# Altium PCB A1_v31.PcbDoc (part 2 of 2)
Units mm, origin at the board's own origin, x right, y up, seen from the top; angles counter-clockwise.
Board outline 100 x 80 mm, 2 copper layers (Top Layer, Bottom Layer); 46 components, 70 nets, 239 pads, 35 vias.
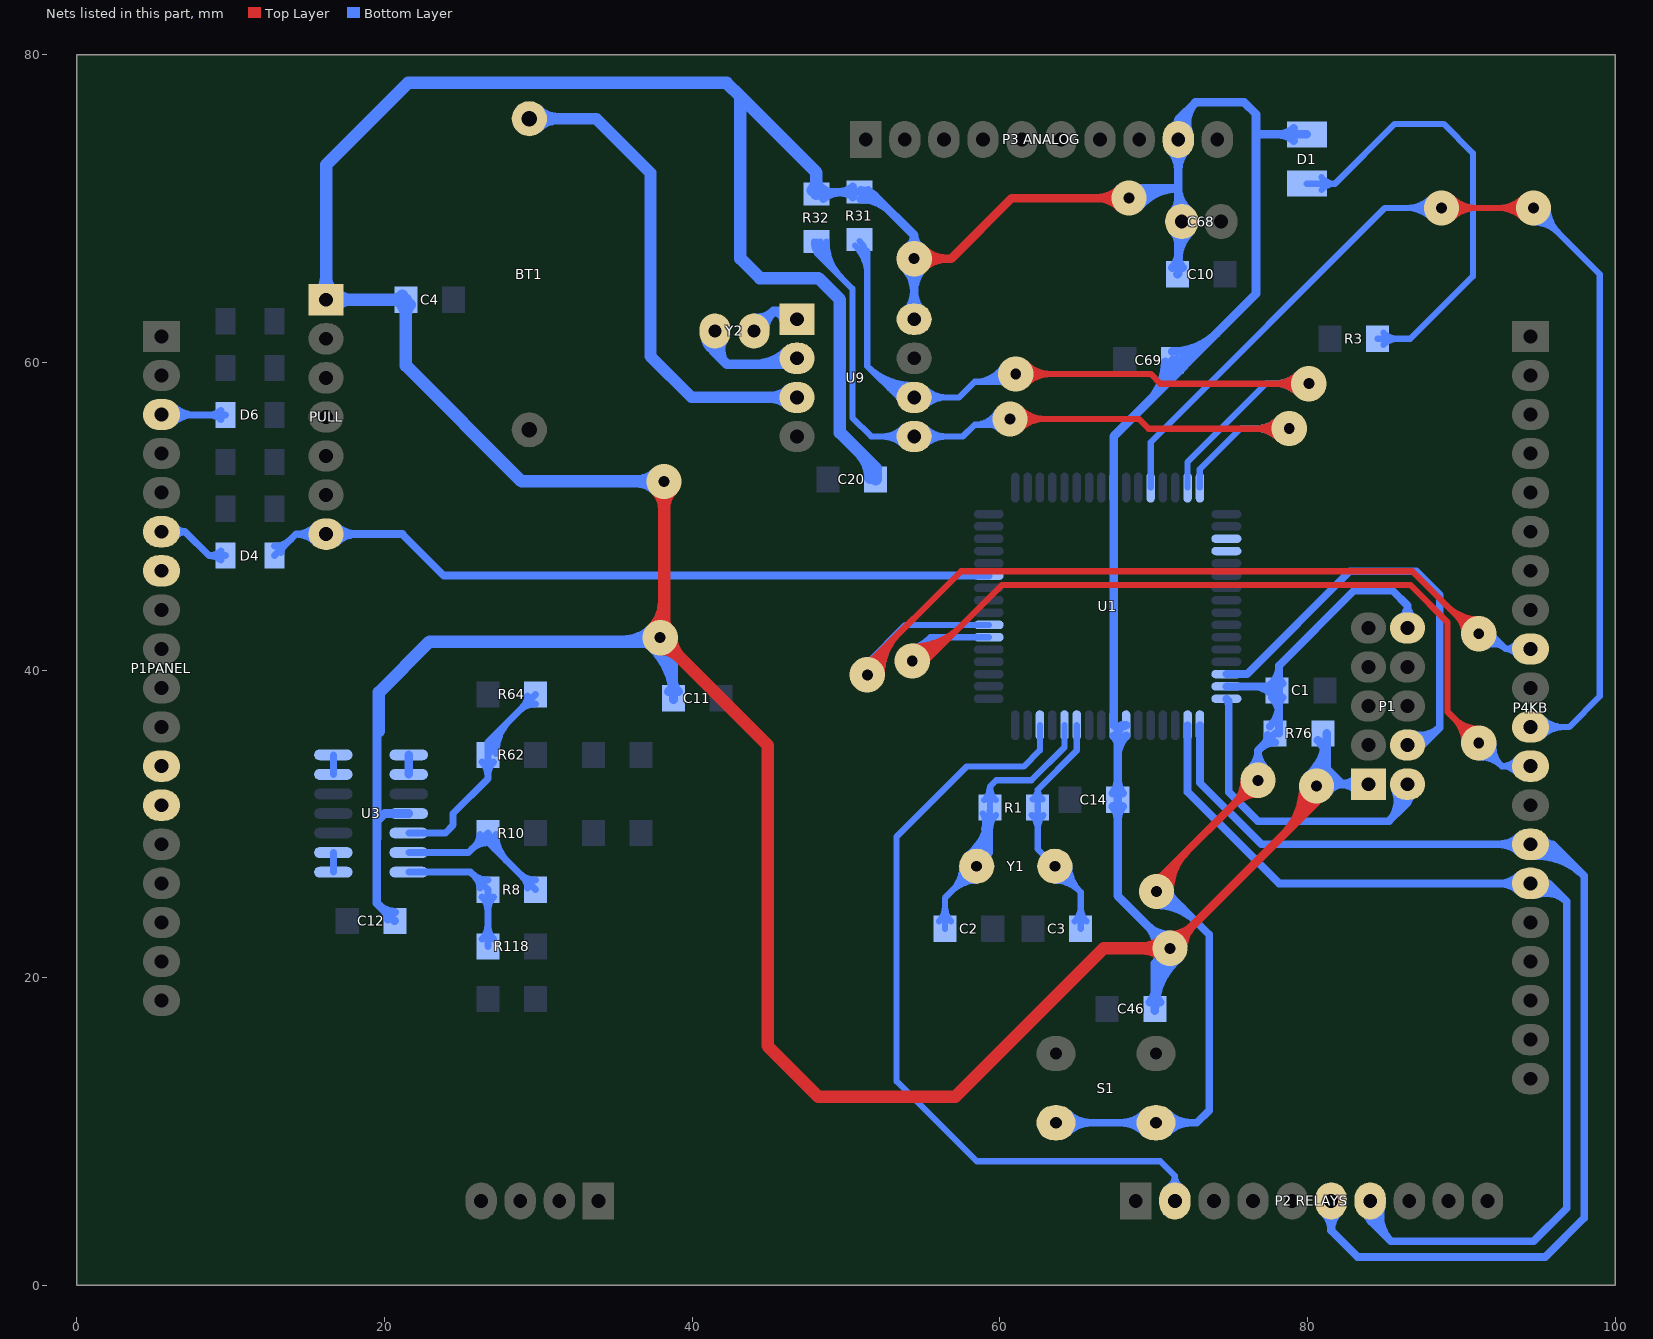
[diagram p2: the nets of this part, all layers, seen from the top]

## Via types
v1: diameter 2.286, hole 0.711, Top Layer to Bottom Layer, 34 vias
v2: diameter 1.905, hole 0.711, Top Layer to Bottom Layer, 1 vias

## Nets (pads, with @x,y where several pads share a name; then routed paths per layer and width w, separated by ;. In a path a pad name is that pad's centre, name@x,y a point inside that pad or via, vN(x,y) a via of type N, cw(c..) or ccw(c..) an arc to the next point about the centre after c; other vN are vias at no path point) (continued)
LLOPIN: D6.2 P1PANEL.3 | length 8.7
  Bottom Layer w0.457: P1PANEL.3@5.5,56.62 5.529,56.591 D6.2@9.652,56.591 ; P1PANEL.3@6.247,56.063 cw(c7.521,54.789) 7.521,56.591 ; P1PANEL.3@6.247,57.177 ccw(c7.661,58.591) 7.661,56.591 ; D6.2@9.354,56.293 ccw(c8.635,55.574) 8.635,56.591 ccw(c8.635,57.608) D6.2@9.354,56.889
MANUAL_R: "P2 RELAYS.6" P4KB.14 U1.1 | length 88.7
  Bottom Layer w0.508: U1.1@73.005,36.42 73.005,32.684 77.009,28.68 P4KB.14@94.5,28.68 95.932,28.68 ; 81.025,4.748 cw(c79.947,3.575) 81.54,3.575 ; 81.54,5.5 81.54,3.575 ; 82.055,4.748 ccw(c83.133,3.575) 81.54,3.575 ; P4KB.14@93.771,28.141 ccw(c92.47,26.84) 92.47,28.68 ccw(c92.47,30.52) P4KB.14@93.771,29.219 ; P4KB.14@94.683,28.934 cw(c94.752,26.701) 96.331,28.281 ; P4KB.14@94.698,28.426 cw(c94.801,25.089) 97.162,27.45 ; P4KB.14@94.714,27.918 cw(c94.851,23.478) 97.993,26.619 ; P4KB.14@95.37,28.335 cw(c95.932,28.05) 95.932,28.68 ; P4KB.14@95.37,29.025 ccw(c95.932,29.31) 95.932,28.68 ; 81.54,3.575 83.261,1.854 95.453,1.854 97.993,4.394 97.993,26.619 ; 95.932,28.68 97.993,26.619
MCONTACT: "P2 RELAYS.7" P4KB.15 U1.2 | length 80.7
  Bottom Layer w0.508: U1.2@72.205,36.42 72.205,32.087 78.152,26.14 P4KB.15@94.5,26.14 95.678,26.14 96.85,24.968 ; 83.812,4.596 cw(c83.668,4.21) 84.08,4.21 ; 83.835,5.375 ccw(c85.095,5.04) 84.173,4.117 ; 84.08,5.5 84.08,4.21 ; 84.325,5.244 ccw(c86.08,4.778) 84.796,3.494 ; 84.347,4.596 ccw(c84.492,4.21) 84.08,4.21 ; 84.816,5.114 ccw(c87.066,4.516) 85.42,2.87 ; P4KB.15@93.771,25.601 ccw(c92.47,24.3) 92.47,26.14 ccw(c92.47,27.98) P4KB.15@93.771,26.679 ; P4KB.15@94.771,25.899 cw(c95.237,24.514) 96.27,25.548 ; P4KB.15@94.933,25.418 cw(c95.529,23.647) 96.85,24.968 ; 84.08,4.21 85.42,2.87 ; 85.42,2.87 94.691,2.87 96.85,5.029 96.85,24.968
MENU: P4KB.11 U1.44 | length 99.3
  Top Layer w0.406: v1@89.099,69.676 cw(c90.01,68.765) 90.01,70.053 cw(c90.01,71.341) v1@89.099,70.43 ; v1@89.387,69.388 cw(c90.991,67.784) 90.991,70.053 cw(c90.991,72.322) v1@89.387,70.718 ; v1@94.026,69.388 ccw(c92.422,67.784) 92.422,70.053 ccw(c92.422,72.322) v1@94.026,70.718 ; v1@94.314,69.676 ccw(c93.403,68.765) 93.403,70.053 ccw(c93.403,71.341) v1@94.314,70.43 ; v1(94.691,70.053) v1(88.722,70.053) ; v1(88.722,70.053) 88.468,70.053 88.722,69.799 v1(88.722,70.053)
  Bottom Layer w0.406: 69.799,53.23 69.805,53.224 ; U1.44@69.805,51.87 69.805,53.224 ; v1@88.057,69.388 ccw(c86.453,67.784) 86.453,70.053 ccw(c86.453,72.322) v1@88.057,70.718 ; v1@88.345,69.676 ccw(c87.434,68.765) 87.434,70.053 ccw(c87.434,71.341) v1@88.345,70.43 ; v1(88.722,70.053) 85.039,70.053 69.805,54.819 69.805,53.224 ; P4KB.11@94.5,36.3 97.006,36.3 99.009,38.303 99.009,65.735 v1(94.691,70.053) ; v1@94.691,69.113 cw(c94.691,66.844) 96.295,68.449 cw(c97.9,70.053) v1@95.631,70.053 ; v1@94.691,69.52 cw(c94.691,68.232) 95.602,69.142 cw(c96.512,70.053) v1@95.224,70.053 ; P4KB.11@95.265,35.725 cw(c96.653,34.338) 96.653,36.3 cw(c96.653,38.262) P4KB.11@95.265,36.875
NetBT1_1: BT1.1 U9.3 | length 37.2
  Bottom Layer w0.762: BT1.1@29.413,75.851 33.775,75.851 37.287,72.339 37.287,60.401 39.954,57.734 U9.3@46.812,57.734 ; BT1.1@29.952,75.312 cw(c31.253,74.011) 31.253,75.851 cw(c31.253,77.691) BT1.1@29.952,76.39 ; U9.3@46.236,57.285 ccw(c45.152,56.201) 45.152,57.734 ccw(c45.152,59.267) U9.3@46.236,58.183
NetC2_2: C2.2 R1.1 U1.12 Y1.2 | length 41.9
  Bottom Layer w0.406: C2.2@56.051,23.677 ccw(c55.118,24.61) 56.438,24.61 ccw(c57.758,24.61) C2.2@56.825,23.677 ; C2.2@56.438,23.19 56.438,25.196 Y1.2@58.496,27.254 59.359,28.117 R1.1@59.359,31.064 ; Y1.2@57.556,27.254 cw(c55.287,27.254) 56.892,25.65 cw(c58.496,24.045) Y1.2@58.496,26.314 ; Y1.2@57.9,27.981 ccw(c55.372,31.064) R1.1@59.359,31.064 ; Y1.2@57.963,27.254 cw(c56.675,27.254) 57.585,26.343 cw(c58.496,25.433) Y1.2@58.496,26.721 ; Y1.2@58.158,27.666 ccw(c56.076,30.205) 59.359,30.205 ; Y1.2@58.415,27.352 ccw(c56.78,29.346) 59.359,29.346 ; Y1.2@58.673,27.038 ccw(c57.485,28.487) 59.359,28.487 ; R1.1@58.885,30.691 cw(c57.819,30.075) 59.009,29.756 ; R1.1@58.972,30.577 cw(c58.039,29.644) 59.359,29.644 cw(c60.679,29.644) R1.1@59.746,30.577 ; 58.976,29.635 cw(c60.337,29.271) R1.1@59.632,30.49 ; R1.1@58.983,31.561 ccw(c58.155,32.435) 59.359,32.435 ccw(c60.563,32.435) R1.1@59.735,31.561 ; U1.12@64.205,36.42 64.205,34.995 62.052,32.842 59.766,32.842 59.359,32.435 R1.1@59.359,31.064
NetC3_2: C3.2 R1.2 U1.11 Y1.1 | length 26.6
  Bottom Layer w0.406: R1.2@62.072,30.577 cw(c61.139,29.644) 62.459,29.644 cw(c63.779,29.644) R1.2@62.846,30.577 ; R1.2@62.139,31.607 ccw(c61.688,32.233) 62.459,32.233 ; R1.2@62.779,31.607 cw(c63.23,32.233) 62.459,32.233 ; Y1.1@63.576,26.314 cw(c63.576,24.045) 65.18,25.65 cw(c66.785,27.254) Y1.1@64.516,27.254 ; Y1.1@63.576,26.721 cw(c63.576,25.433) 64.487,26.343 cw(c65.397,27.254) Y1.1@64.109,27.254 ; C3.2@64.866,23.677 ccw(c63.933,24.61) 65.253,24.61 ccw(c66.573,24.61) C3.2@65.64,23.677 ; U1.11@65.005,36.42 65.005,34.779 62.459,32.233 ; C3.2@65.253,23.19 65.253,25.577 Y1.1@63.576,27.254 62.459,28.371 R1.2@62.459,31.064 62.459,32.233
NetD1_2: D1.2 R3.1 | length 33.2
  Bottom Layer w0.406: D1.2@79.959,71.628 81.788,71.628 ; D1.2@80.906,71.214 cw(c81.788,70.481) 81.788,71.628 ; D1.2@80.906,72.042 ccw(c81.788,72.775) 81.788,71.628 ; R3.1@84.557,61.544 86.69,61.544 90.754,65.608 90.754,73.609 88.849,75.514 85.674,75.514 81.788,71.628 ; R3.1@84.944,61.157 cw(c85.877,60.224) 85.877,61.544 cw(c85.877,62.864) R3.1@84.944,61.931
NetR8_1: R8.1 R10.2 U3.6 | length 17.5
  Bottom Layer w0.457: U3.6@21.576,28.143 25.45,28.143 R10.2@26.72,29.413 26.72,28.83 R8.1@29.82,25.73 ; 25.659,28.352 cw(c26.72,27.291) R10.2@26.72,28.792 ; 25.901,28.594 ccw(c25.181,29.313) R10.2@26.199,29.313 ; R10.2@26.784,29.313 ccw(c28.105,29.313) 27.171,28.379 ; R10.2@27.241,29.313 ccw(c29.666,29.313) 27.952,27.598 ; 28.759,26.791 ccw(c29.82,27.852) R8.1@29.82,26.351 ; 29.001,26.549 cw(c28.281,25.83) R8.1@29.299,25.83
NetR8_2: R8.2 R118.1 U3.7 | length 15.2
  Bottom Layer w0.457: U3.7@21.576,26.873 25.577,26.873 R8.2@26.72,25.73 R118.1@26.72,22.047 ; 25.659,26.791 ccw(c26.72,27.852) R8.2@26.72,26.351 ; 25.901,26.549 cw(c25.181,25.83) R8.2@26.199,25.83 ; R118.1@26.351,22.516 ccw(c25.461,23.406) 26.72,23.406 ccw(c27.979,23.406) R118.1@27.089,22.516 ; R8.2@26.351,25.261 cw(c25.461,24.371) 26.72,24.371 cw(c27.979,24.371) R8.2@27.089,25.261
NetR62_2: R62.2 R64.2 U3.5 | length 21.7
  Bottom Layer w0.457: U3.5@21.576,29.413 23.952,29.413 24.46,29.921 24.46,30.683 26.72,32.943 R62.2@26.72,34.493 26.72,35.33 R64.2@29.82,38.43 ; R62.2@26.351,34.024 cw(c25.461,33.134) 26.72,33.134 cw(c27.979,33.134) R62.2@27.089,34.024 ; R62.2@26.784,34.593 cw(c28.718,34.593) 27.351,35.961 ; R62.2@27.241,34.593 cw(c30.279,34.593) 28.131,36.741 ; 28.759,37.369 cw(c29.82,36.308) R64.2@29.82,37.809 ; 29.001,37.611 ccw(c28.281,38.33) R64.2@29.299,38.33
NetU3_1: U3.1 U3.2 | length 1.3
  Bottom Layer w0.559: U3.2@21.576,33.223 U3.1@21.576,34.493
NetU3_8: U3.8 U3.9 | length 1.3
  Bottom Layer w0.457: U3.8@16.676,26.873 U3.9@16.676,28.143
NetU3_13: U3.13 U3.14 | length 1.3
  Bottom Layer w0.457: U3.13@16.676,33.223 U3.14@16.676,34.493
NetU9_1: U9.1 Y2.1 | length 7.1
  Bottom Layer w0.61: Y2.1@43.891,61.925 Y2.1@44.018,62.052 45.288,63.322 ; Y2.1@44.084,62.887 ccw(c44.223,64.387) 45.288,63.322 ; Y2.1@44.729,62.179 cw(c46.14,62.179) 45.142,63.176 ; U9.1@45.98,62.718 ccw(c45.288,62.623) 45.288,63.322 ; U9.1@46.812,62.814 46.304,63.322 45.288,63.322
NetU9_2: U9.2 Y2.2 | length 16.7
  Bottom Layer w0.61: Y2.2@41.054,62.204 ccw(c41.887,61.656) 41.182,60.951 ; Y2.2@41.059,61.351 cw(c40.638,60.775) 41.351,60.775 ; 41.351,60.775 cw(c41.848,60.775) Y2.2@41.696,61.248 ; Y2.2@41.351,61.925 41.351,60.782 42.24,59.893 ; Y2.2@41.563,61.869 ccw(c42.525,61.236) 41.711,60.422 ; Y2.2@42.072,61.534 ccw(c43.164,60.817) 42.24,59.893 ; 44.048,59.893 ccw(c44.048,62.911) U9.2@46.182,60.777 ; 45.52,59.893 ccw(c45.52,61.439) U9.2@46.613,60.346 ; U9.2@46.812,60.274 46.431,59.893 42.24,59.893
PREHEATER: "P2 RELAYS.2" U1.14 | length 53.2
  Bottom Layer w0.406: U1.14@62.605,36.42 62.605,34.792 61.544,33.731 57.834,33.731 53.289,29.186 53.289,13.284 58.496,8.077 70.434,8.077 71.38,7.131 ; 70.96,6.386 ccw(c70.51,7.131) 71.38,7.131 ; 71.38,5.5 71.38,7.131 ; 71.8,6.386 cw(c72.25,7.131) 71.38,7.131
R1IN: P1PANEL.12
REMOT: D4.1 PULL.7 U1.27 | length 55.4
  Bottom Layer w0.457: D4.1@12.852,47.447 14.249,48.844 ; D4.1@12.852,48.068 ccw(c12.852,49.569) 13.913,48.508 ; D4.1@13.273,47.647 cw(c13.808,47.647) D4.1@13.43,48.025 ; PULL.7@15.506,48.303 ccw(c14.249,47.114) 14.249,48.844 ; PULL.7@15.506,49.385 cw(c14.249,50.574) 14.249,48.844 ; PULL.7@16.205,48.844 14.249,48.844
  Bottom Layer w0.508: PULL.7@16.205,48.844 21.158,48.844 23.857,46.145 U1.27@59.28,46.145 ; PULL.7@16.871,48.305 cw(c18.172,47.004) 18.172,48.844 cw(c18.172,50.684) PULL.7@16.871,49.383
REMOTIN: D4.2 P1PANEL.6 | length 8
  Bottom Layer w0.457: P1PANEL.6@5.5,49 7.032,49 ; P1PANEL.6@6.378,48.616 cw(c7.032,48.251) 7.032,49 ; P1PANEL.6@6.378,49.384 ccw(c7.032,49.749) 7.032,49 ; D4.2@9.354,47.149 ccw(c8.635,46.43) 8.635,47.447 ccw(c8.635,48.464) D4.2@9.354,47.745 ; D4.2@9.652,47.447 8.585,47.447 7.032,49
RESET: C1.2 P1.10 R76.2 S1.1 U1.63 | length 97.8
  Top Layer w0.508: v1(70.18,25.603) 70.18,26.238 v1(76.784,32.842) ; v1@70.18,26.492 ccw(c70.18,27.105) 70.614,26.672 ; v1@70.561,25.603 cw(c73.014,25.603) 71.279,27.337 ; v1@71.069,25.603 cw(c74.748,25.603) 72.147,28.205 ; v1@75.895,32.842 cw(c73.749,32.842) 75.266,31.324 cw(c76.784,29.807) v1@76.784,31.953
  Bottom Layer w0.508: S1.1@63.651,10.576 S1.1@70.151,10.576 72.806,10.576 73.609,11.379 73.609,22.809 70.815,25.603 v1(70.18,25.603) ; S1.1@64.407,9.947 cw(c65.924,8.43) 65.924,10.576 cw(c65.924,12.722) S1.1@64.407,11.205 ; S1.1@69.395,9.947 ccw(c67.878,8.43) 67.878,10.576 ccw(c67.878,12.722) S1.1@69.395,11.205 ; v1@70.18,24.714 cw(c70.18,21.035) 72.782,23.636 ; v1@70.18,25.222 cw(c70.18,22.769) 71.914,24.504 ; S1.1@70.907,9.947 cw(c72.424,8.43) 72.424,10.576 cw(c72.424,12.722) S1.1@70.907,11.205 ; v1@71.069,25.603 ccw(c71.682,25.603) 71.249,25.169 ; U1.63@74.73,38.945 C1.2@77.894,38.945 ; v1@76.206,33.517 ccw(c75.132,34.773) 76.784,34.773 ; 76.442,38.945 cw(c76.442,37.198) C1.2@77.677,38.433 ; v1(76.784,32.842) 76.784,34.773 ; 76.884,34.873 cw(c77.901,33.855) R76.2@77.901,35.294 ; 77.125,35.114 ccw(c76.449,35.79) R76.2@77.405,35.79 ; 77.219,38.945 ccw(c77.219,39.593) 77.677,39.135 ccw(c76.524,40.288) 78.155,40.288 ; v1@77.362,33.517 cw(c78.436,34.773) 76.784,34.773 ; R76.2@77.55,36.341 ccw(c76.09,37.801) 78.155,37.801 ; C1.2@77.677,38.233 cw(c76.524,37.08) 78.155,37.08 ; R76.2@77.901,35.89 76.784,34.773 ; C1.2@78.028,38.684 C1.2@78.155,38.811 ; R76.2@78.155,35.89 C1.2@78.155,38.811 ; 78.155,37.693 cw(c78.919,37.693) C1.2@78.379,38.233 ; 78.155,39.675 ccw(c78.919,39.675) C1.2@78.379,39.135 ; P1.10@86.064,43.373 ccw(c85.481,44.208) 86.499,44.208 ; P1.10@86.499,42.748 86.499,44.208 ; P1.10@86.935,43.373 cw(c87.518,44.208) 86.499,44.208 ; C1.2@78.155,38.811 78.155,40.309 83.007,45.161 85.547,45.161 86.499,44.208
RESET_KEY: P4KB.12 U1.22 | length 84.2
  Top Layer w0.406: v1@54.305,40.716 ccw(c54.305,43.169) 56.039,41.434 ; v1@54.305,41.122 ccw(c54.305,44.556) 56.733,42.128 ; v1@54.305,41.529 ccw(c54.305,45.944) 57.427,42.822 ; v1@90.195,35.255 ccw(c87.926,35.255) 89.531,36.859 ccw(c91.135,38.464) v1@91.135,36.195 ; v1@90.602,35.255 ccw(c89.314,35.255) 90.224,36.166 ccw(c91.135,37.076) v1@91.135,35.788 ; v1(91.135,35.255) 89.103,37.287 89.103,43.129 86.69,45.542 60.147,45.542 55.194,40.589 v1(54.305,40.589) v1@54.178,40.589 ; v1@54.178,40.589 53.67,40.081 53.67,40.335 53.924,40.589 v1@54.178,40.589
  Bottom Layer w0.406: v1(54.305,40.589) 54.178,40.589 53.67,40.081 53.67,40.335 55.48,42.145 ; v1@54.305,41.529 ccw(c54.305,42.878) 55.259,41.924 ; v1@54.809,40.764 cw(c55.652,41.056) 55.021,41.686 ; v1@55.193,40.897 cw(c56.333,41.292) 55.48,42.145 ; U1.22@59.28,42.145 55.48,42.145 ; v1(91.135,35.255) 92.63,33.76 ; v1@91.162,34.722 cw(c91.218,33.641) 91.983,34.407 cw(c92.749,35.172) v1@91.668,35.228 ; v1@91.183,34.316 cw(c91.281,32.411) 92.63,33.76 ; v1@92.074,35.207 ccw(c93.979,35.109) 92.63,33.76 ; P4KB.12@93.672,33.256 ccw(c92.63,32.431) 92.63,33.76 ; P4KB.12@93.672,34.264 cw(c92.63,35.089) 92.63,33.76 ; P4KB.12@94.5,33.76 92.63,33.76
RSTARTIN: P1PANEL.7
RX: U1.52
SCL: R31.2 U1.47 U9.6 | length 84.1
  Top Layer w0.406: v1(61.036,59.258) 69.799,59.258 70.434,58.623 v1(80.086,58.623) ; v1@61.413,58.881 cw(c62.324,57.97) 62.324,59.258 cw(c62.324,60.546) v1@61.413,59.635 ; v1@61.701,58.593 cw(c63.305,56.989) 63.305,59.258 cw(c63.305,61.527) v1@61.701,59.923 ; v1@79.421,57.958 ccw(c77.817,56.354) 77.817,58.623 ccw(c77.817,60.892) v1@79.421,59.288 ; v1@79.709,58.246 ccw(c78.798,57.335) 78.798,58.623 ccw(c78.798,59.911) v1@79.709,59
  Bottom Layer w0.406: R31.2@50.589,67.608 cw(c48.671,65.69) 51.384,65.69 ; R31.2@50.877,67.896 cw(c49.652,66.671) 51.384,66.671 ; 51.384,67.233 51.384,59.766 U9.6@53.416,57.734 ; 51.4,59.75 ccw(c54.305,62.655) U9.6@54.305,58.547 ; 52.094,59.056 ccw(c54.305,61.268) U9.6@54.305,58.14 ; 52.787,58.363 ccw(c54.305,59.88) U9.6@54.305,57.734 ; U9.6@54.432,57.734 57.353,57.734 58.369,58.75 ; U9.6@55.134,57.159 cw(c56.521,55.772) 56.521,57.734 cw(c56.521,59.696) U9.6@55.134,58.309 ; 59.118,58.75 ccw(c59.118,60.504) v1@60.589,59.549 ; 59.866,58.75 ccw(c59.866,60.018) v1@60.929,59.327 ; 59.994,58.75 cw(c59.994,58.216) v1@60.371,58.593 ; v1@60.248,59.77 cw(c58.369,60.99) 58.369,58.75 ; v1@60.401,58.75 58.369,58.75 ; U1.47@72.205,51.87 72.205,53.536 77.292,58.623 v1(80.086,58.623) ; v1@79.421,57.958 ccw(c77.817,56.354) 77.817,58.623 ccw(c77.817,60.892) v1@79.421,59.288 ; v1@79.709,58.246 ccw(c78.798,57.335) 78.798,58.623 ccw(c78.798,59.911) v1@79.709,59
SDA: R32.2 U1.48 U9.5 | length 81.7
  Top Layer w0.406: v1(60.655,56.337) 69.037,56.337 69.672,55.702 v1(78.816,55.702) ; v1@61.032,55.96 cw(c61.943,55.049) 61.943,56.337 cw(c61.943,57.625) v1@61.032,56.714 ; v1@61.32,55.672 cw(c62.924,54.068) 62.924,56.337 cw(c62.924,58.606) v1@61.32,57.002 ; v1@78.151,55.037 ccw(c76.547,53.433) 76.547,55.702 ccw(c76.547,57.971) v1@78.151,56.367 ; v1@78.439,55.325 ccw(c77.528,54.414) 77.528,55.702 ccw(c77.528,56.99) v1@78.439,56.079
  Bottom Layer w0.406: R32.2@47.916,67.868 ccw(c49.292,67.868) 48.319,66.895 ; R32.2@48.082,67.868 48.082,67.132 50.419,64.795 50.419,56.413 51.638,55.194 U9.5@54.432,55.194 57.607,55.194 58.369,55.956 ; R32.2@48.322,67.868 ccw(c50.68,67.868) 49.013,66.201 ; R32.2@48.729,67.868 ccw(c52.067,67.868) 49.707,65.507 ; U9.5@53.73,54.619 ccw(c52.343,53.232) 52.343,55.194 ccw(c52.343,57.156) U9.5@53.73,55.769 ; U9.5@55.134,54.619 cw(c56.521,53.232) 56.521,55.194 cw(c56.521,57.156) U9.5@55.134,55.769 ; 59.072,55.956 ccw(c59.072,57.249) v1@60.193,56.603 ; 59.306,55.956 cw(c59.306,54.988) v1@59.99,55.672 ; v1@59.841,56.806 cw(c58.369,57.655) 58.369,55.956 ; v1@60.02,55.956 58.369,55.956 ; U1.48@73.005,51.87 73.005,53.066 75.641,55.702 v1(78.816,55.702) ; v1@78.151,55.037 ccw(c76.547,53.433) 76.547,55.702 ccw(c76.547,57.971) v1@78.151,56.367 ; v1@78.439,55.325 ccw(c77.528,54.414) 77.528,55.702 ccw(c77.528,56.99) v1@78.439,56.079
SWD_CLK: P1.4 U1.62 | length 31.8
  Bottom Layer w0.508: U1.62@74.73,39.745 76.067,39.745 82.753,46.431 87.071,46.431 88.595,44.907 88.595,36.271 ; P1.4@86.499,35.128 87.452,35.128 88.595,36.271 ; P1.4@86.705,35.37 ccw(c87.099,36.592) 88.008,35.684 ; P1.4@86.861,35.853 ccw(c87.386,37.48) 88.595,36.271
SWD_DIO: P1.2 U1.64 | length 27.8
  Bottom Layer w0.508: U1.64@74.715,38.13 cw(c74.32,37.735) 74.879,37.735 ; U1.64@74.73,38.145 74.879,37.996 74.879,32.08 76.784,30.175 85.293,30.175 ; P1.2@85.678,32.275 cw(c83.964,31.504) 85.293,30.175 ; 85.813,30.695 ccw(c84.682,31.827) P1.2@86.141,32.484 ; P1.2@86.172,31.9 cw(c85.925,31.382) 86.499,31.382 ; 86.334,31.216 ccw(c85.399,32.15) P1.2@86.604,32.692 ; P1.2@86.499,32.588 86.499,31.381 ; P1.2@86.827,31.9 ccw(c87.074,31.382) 86.499,31.382 ; 85.293,30.175 86.499,31.381
TIOUT: P1PANEL.13
TX: U1.51
UP: P4KB.9 U1.23 | length 82.9
  Top Layer w0.406: v1(51.384,39.7) 51.384,40.335 57.48,46.431 86.817,46.431 90.881,42.367 v1(91.135,42.367) ; v1@51.384,40.64 ccw(c51.384,41.376) 51.904,40.855 ; v1@51.511,39.7 cw(c53.351,39.7) 52.05,41.001 ; v1@51.917,39.7 cw(c54.738,39.7) 52.744,41.695 ; v1@52.324,39.7 cw(c56.126,39.7) 53.437,42.388 ; 89.097,44.151 ccw(c91.135,46.189) v1@91.135,43.307 ; 89.71,43.538 cw(c88.54,42.367) v1@90.195,42.367 ; 89.791,43.457 ccw(c91.135,44.801) v1@91.135,42.9
  Bottom Layer w0.406: v1(51.384,39.7) 51.384,40.462 53.867,42.945 U1.23@59.28,42.945 ; v1@51.511,39.7 cw(c53.657,39.7) 52.14,41.218 ; v1@51.917,39.7 cw(c55.045,39.7) 52.833,41.911 ; v1@52.324,39.7 cw(c56.432,39.7) 53.527,42.605 ; v1(91.135,42.367) 90.881,42.367 90.754,42.494 91.77,42.494 92.884,41.38 ; v1@91.4,41.904 cw(c91.857,41.105) 92.508,41.756 ; v1@91.602,41.551 cw(c92.131,40.627) 92.884,41.38 ; P4KB.9@93.61,40.966 ccw(c92.884,40.536) 92.884,41.38 ; P4KB.9@93.61,41.794 cw(c92.884,42.224) 92.884,41.38 ; P4KB.9@94.5,41.38 92.884,41.38
VCC: "P3 ANALOG.9" C4.2 C10.2 C11.2 C12.2 C14.2 C20.2 C46.2 C68.1 C69.2 D1.1 P1.1 PULL.1 R31.1 R32.1 R76.1 U1.7 U1.8 U1.41 U3.4 U9.8 | length 494.9
  Top Layer w0.559: v1(54.432,66.751) 56.845,66.751 60.782,70.688 v1(68.402,70.688) ; v1@55.043,66.14 cw(c56.517,64.666) 56.517,66.751 cw(c56.517,68.836) v1@55.043,67.362 ; v1@67.791,70.077 ccw(c66.317,68.603) 66.317,70.688 ccw(c66.317,72.773) v1@67.791,71.299 ; v1(71.069,21.92) 80.594,31.445 v1(80.594,32.461) ; v1@71.069,22.784 ccw(c71.069,24.869) 72.543,23.394 ccw(c74.018,21.92) v1@71.933,21.92 ; 78.401,29.252 ccw(c75.193,32.461) v1@79.73,32.461 ; 79.355,30.206 ccw(c77.101,32.461) v1@80.289,32.461 ; 80.309,31.16 ccw(c79.008,32.461) v1@80.848,32.461
  Top Layer w0.813: v1@37.401,42.634 ccw(c35.53,44.505) 38.176,44.505 ; v1@37.655,51.752 cw(c36.398,50.495) 38.176,50.495 cw(c39.954,50.495) v1@38.697,51.752 ; v1@37.922,41.376 cw(c37.922,39.598) 39.179,40.856 cw(c40.437,42.113) v1@38.659,42.113 ; 38.176,43.278 ccw(c39.087,43.278) v1@38.443,42.634 ; v1(38.176,52.273) 38.176,42.367 v1(37.922,42.113) 44.907,35.128 44.907,15.57 48.209,12.268 57.099,12.268 66.751,21.92 v1(71.069,21.92) ; v1@70.548,21.399 ccw(c69.291,20.142) 69.291,21.92 ccw(c69.291,23.698) v1@70.548,22.441
  Bottom Layer w0.559: 19.507,29.032 19.507,24.841 20.65,23.698 C12.2@20.676,23.698 ; 19.634,30.302 20.015,30.683 U3.4@21.576,30.683 ; 19.658,24.69 ccw(c20.676,25.709) C12.2@20.676,24.269 ; C12.2@19.962,24.386 cw(c19.373,23.798) C12.2@20.205,23.798 ; v1@37.326,41.488 cw(c34.081,38.083) C11.2@38.785,38.083 ; v1@37.712,41.892 cw(c35.324,39.387) 38.785,39.387 ; v1@38.049,41.859 38.785,41.123 C11.2@38.785,38.176 ; v1@38.097,42.297 cw(c36.567,40.691) 38.785,40.691 ; C11.2@38.452,38.609 ccw(c37.649,39.412) 38.785,39.412 ccw(c39.921,39.412) C11.2@39.118,38.609 ; R32.1@48.082,71.069 R31.1@50.622,71.069 ; R32.1@48.515,70.635 cw(c49.562,69.588) 49.562,71.069 ; R32.1@48.515,71.301 ccw(c49.074,71.86) 49.074,71.069 ; 49.577,71.069 ccw(c49.577,72.294) R31.1@50.443,71.428 ; 49.703,71.069 cw(c49.703,70.022) R31.1@50.443,70.762 ; R31.1@50.976,70.624 cw(c50.976,67.953) 52.865,69.842 ; R31.1@50.976,71.183 cw(c50.976,69.861) 51.911,70.796 ; R31.1@51.029,70.688 51.156,70.815 51.892,70.815 ; R31.1@51.437,71.187 ccw(c51.892,71.279) 51.892,70.815 ; v1@53.821,66.14 cw(c52.347,64.666) 54.432,64.666 cw(c56.517,64.666) v1@55.043,66.14 ; U9.8@53.911,63.335 ccw(c52.654,64.592) 54.432,64.592 ccw(c56.21,64.592) U9.8@54.953,63.335 ; v1@53.988,67.492 ccw(c53.519,68.275) 54.432,68.275 ; U9.8@54.432,62.814 v1(54.432,66.751) 54.432,68.275 ; v1@54.876,67.492 cw(c55.345,68.275) 54.432,68.275 ; C14.2@67.333,31.139 cw(c66.53,30.336) 67.666,30.336 cw(c68.802,30.336) C14.2@67.999,31.139 ; C14.2@67.333,32.005 ccw(c66.53,32.808) 67.666,32.808 ccw(c68.802,32.808) C14.2@67.999,32.005 ; U1.8@67.402,36.417 ccw(c67.663,36.684) 67.927,36.42 ; U1.8@67.405,36.42 U1.41@67.405,51.87 67.405,55.213 76.657,64.465 76.657,74.879 ; U1.8@67.408,35.723 cw(c66.786,35.101) 67.666,35.101 ; 67.666,34.429 cw(c69.496,34.429) U1.7@68.202,35.723 ; U1.8@67.666,35.821 cw(c68.273,35.821) U1.7@68.205,36.424 ; 67.738,36.231 cw(c68.205,35.764) U1.7@68.205,36.424 ; U1.7@68.205,36.42 67.927,36.42 ; v1(68.402,70.688) 69.037,71.323 71.6,71.323 ; v1@68.636,70.493 cw(c70.407,69.018) 70.407,71.323 ; v1@69.066,70.135 cw(c71.6,68.025) 71.6,71.323 ; 69.7,57.508 ccw(c67.16,60.047) C69.2@70.751,60.047 ; C46.2@69.746,18.416 ccw(c68.943,19.219) 70.079,19.219 ccw(c71.215,19.219) C46.2@70.412,18.416 ; C46.2@70.079,17.861 cw(c74.587,17.861) v1@71.635,21.267 ; C46.2@70.079,17.983 70.079,20.93 v1(71.069,21.92) 67.666,25.323 C14.2@67.666,31.572 67.666,36.159 67.927,36.42 ; 70.079,19.084 cw(c73.527,19.084) v1@71.269,21.69 ; 70.079,20.308 cw(c72.466,20.308) v1@70.903,22.112 ; v1@70.205,21.92 ccw(c68.12,21.92) 69.595,23.394 ccw(c71.069,24.869) v1@71.069,22.784 ; 70.653,58.461 ccw(c69.068,60.047) C69.2@71.31,60.047 ; 71.079,73.789 cw(c69.822,72.531) 71.6,72.531 cw(c73.378,72.531) 72.121,73.789 ; C10.2@71.218,66.168 ccw(c70.297,67.089) 71.6,67.089 ; C69.2@71.222,59.6 ccw(c71.222,60.976) 72.195,60.003 ; C69.2@71.222,60.159 ccw(c71.222,62.884) 73.149,60.957 ; C69.2@71.222,60.718 ccw(c71.222,64.792) 74.103,61.911 ; C68.1@71.265,68.535 cw(c70.457,67.727) 71.6,67.727 ; C68.1@71.265,69.793 ccw(c70.457,70.601) 71.6,70.601 ; 71.319,75.371 ccw(c71.146,75.791) 71.6,75.791 ; C10.2@71.551,65.735 71.6,65.784 71.6,71.323 ; 71.6,66.611 cw(c74.32,66.611) C68.1@72.397,68.535 ; 71.6,66.853 ccw(c72.569,66.853) C10.2@71.884,66.168 ; 71.6,67.96 cw(c72.971,67.96) C68.1@72.002,68.93 ; 71.767,74.752 cw(c73.138,75.261) 72.104,76.295 ; 71.881,75.371 cw(c72.054,75.791) 71.6,75.791 ; 72.291,74.947 cw(c74.037,75.594) 72.72,76.911 ; C68.1@72.319,69.861 cw(c73.445,71.323) 71.6,71.323 ; D1.1@79.106,74.425 ccw(c78.131,73.45) 78.131,74.828 ccw(c78.131,76.206) D1.1@79.106,75.231 ; D1.1@79.959,74.828 76.708,74.828 76.657,74.879 ; v1@80.016,33.102 ccw(c77.501,35.89) 81.255,35.89 81.255,33.578 82.245,32.588 ; v1@80.39,32.687 ccw(c78.634,34.633) 81.255,34.633 ; v1@80.594,32.588 82.245,32.588 ; R76.1@80.668,35.457 cw(c79.252,34.041) 81.255,34.041 ; v1@81.237,33.038 ccw(c82.245,33.943) 82.245,32.588 ; v1@81.356,32.055 cw(c82.245,31.581) 82.245,32.588 ; P1.1@83.27,32.112 ccw(c82.245,31.246) 82.245,32.588 ; P1.1@83.27,33.064 cw(c82.245,33.93) 82.245,32.588 ; P1.1@83.959,32.588 82.245,32.588 ; 51.892,70.815 54.432,68.275 ; 71.6,71.323 71.6,74.5 71.6,75.791 ; 71.6,75.791 72.72,76.911 ; 72.72,76.911 75.895,76.911 76.657,76.149 76.657,74.879
  Bottom Layer w0.61: 19.507,29.032 19.507,35.89 19.634,36.017
  Bottom Layer w0.813: PULL.1@15.774,64.515 ccw(c14.733,65.556) 16.205,65.556 ccw(c17.677,65.556) PULL.1@16.636,64.515 ; PULL.1@16.763,63.653 cw(c17.804,62.612) 17.804,64.084 cw(c17.804,65.556) PULL.1@16.763,64.515 ; 19.634,36.017 19.634,38.557 22.936,41.859 v1@38.049,41.859 ; C4.2@21.143,63.741 cw(c20.556,63.154) 21.386,63.154 cw(c22.216,63.154) C4.2@21.629,63.741 ; C4.2@21.143,63.841 ccw(c20.556,63.254) 20.556,64.084 ccw(c20.556,64.914) C4.2@21.143,64.327 ; 35.53,41.859 ccw(c35.53,44.505) v1@37.401,42.634 ; 36.757,41.859 cw(c36.757,40.948) v1@37.401,41.592 ; v1@37.655,51.752 ccw(c36.398,50.495) 36.398,52.273 ccw(c36.398,54.051) v1@37.655,52.794 ; v1(38.176,52.273) 28.905,52.273 21.386,59.792 C4.2@21.386,64.084 PULL.1@16.205,64.084 16.205,72.847 21.539,78.181 42.24,78.181 43.129,77.292 ; R32.1@47.839,71.211 ccw(c47.252,71.798) 48.082,71.798 ccw(c48.912,71.798) R32.1@48.325,71.211 ; R32.1@48.082,70.968 48.082,71.069 48.082,72.339 43.129,77.292 ; 50.882,54.172 cw(c49.209,52.5) C20.2@51.574,52.5 ; C20.2@51.918,52.4 51.918,53.136 49.606,55.448 49.606,64.084 48.209,65.481 44.399,65.481 43.129,66.751 43.129,77.292
pads on no net: "P2 RELAYS.9" "P2 RELAYS.10" "P3 ANALOG.8" P1.6 P1.7 P1.8 P1.9 P1PANEL.14 P1PANEL.15 P1PANEL.16 P1PANEL.17 P1PANEL.18 P4KB.13 P4KB.17 P4KB.18 P4KB.19 P4KB.20 PSTR1.2 PSTR1.3 PSTR1.4 U1.16 U1.17 U1.18 U1.25 U1.26 U1.35 U1.36 U1.39 U1.43 U1.55 U1.56 U1.61 U9.7
copper on no net: | length 1440
  Top Layer w0.203: 0,0 0,80 100,80 100,0 0,0
  Top Layer w0.254: 0,0 0,80 100,80 100,0 0,0
  Bottom Layer w0.203: 0,0 0,80 100,80 100,0 0,0
  Bottom Layer w0.254: 0,0 0,80 100,80 100,0 0,0

## Polygon pours and split planes (outlines as drawn)
GND on Bottom Layer "Top Layer-No Net 1" (solid, remove dead copper, pour order 34): 66.098,38.195 66.516,38.195 66.751,38.43 66.605,38.576 66.605,44.526 66.605,49.86 66.597,49.868 65.923,49.868 65.923,49.032 65.608,48.717 65.608,38.43
GND on Bottom Layer "Top Layer-No Net 1" (solid, remove dead copper, pour order 32): 65.879,26.731 65.989,26.621 65.989,24.968 65.989,24.714 66.624,24.079 67.955,22.748 68.393,22.748 68.393,23.453 67.386,24.46 66.878,24.968 66.878,26.111 66.878,29.413 66.116,30.175 65.862,30.429 65.862,32.461 66.624,33.223 66.624,34.239 66.624,35.255 66.751,35.382 66.878,35.509 66.878,36.144 66.878,36.652 65.608,36.652 65.608,33.985 64.846,33.223 64.211,32.588 64.211,30.175 64.211,29.327 64.225,29.313 65.454,29.313 65.608,29.159 65.774,28.993 65.774,26.983
GND on Bottom Layer "Top Layer-No Net 1" (solid, remove dead copper, pour order 30): 13.411,7.696 87.96,7.696 91.77,11.506 91.77,37.795 91.77,75.895 89.357,78.308 83.642,78.308 72.466,78.308 71.069,76.911 70.815,76.657 70.815,71.831 49.86,71.831 45.415,76.276 44.018,77.673 14.427,77.673 8.839,72.085 8.839,64.211 8.839,12.268 13.284,7.823
GND on Bottom Layer "Top Layer-No Net 1" (solid, remove dead copper, pour order 22): 49.606,51.638 49.606,53.924 47.828,55.702 47.32,56.21 46.05,56.21 38.557,56.21 35.001,59.766 35.001,72.212 33.604,73.609 33.477,73.736 29.413,73.736 23.19,73.736 21.666,72.212 21.666,67.005 23.698,64.973 23.698,62.814 24.333,62.179 28.27,58.242 28.27,55.702 28.27,55.575 29.286,54.559 35.001,54.559 39.446,54.559 40.589,53.416 40.589,52.4 41.351,51.638 41.732,51.257 44.272,51.257 47.828,51.257 48.336,51.765 48.463,51.638 49.098,51.638
GND on Bottom Layer "Top Layer-No Net 1" (solid, remove dead copper, pour order 20): 74.117,75.641 74.752,75.641 75.514,74.879 75.387,74.752 75.387,69.291 75.387,64.592 74.117,63.322 72.72,61.925 70.434,61.925 70.053,61.925 69.037,60.909 69.037,59.258 69.037,58.242 68.021,57.226 66.751,55.956 66.751,53.162 65.735,54.178 65.735,55.829 65.735,59.766 66.116,60.147 68.529,62.56 68.529,64.465 68.529,64.846 68.148,65.227 67.513,65.862 67.513,67.005 67.513,67.767 67.894,68.148 69.164,68.148 69.545,68.148 69.926,67.767 69.926,64.719 70.561,64.084 72.72,64.084 73.355,64.719 73.355,69.037 73.355,74.244 73.228,74.371
VCC on Bottom Layer "Top Layer-No Net 1" (solid, remove dead copper, pour order 18): 72.593,74.371 72.593,75.768 73.228,76.403 75.514,76.403 75.768,76.149 76.403,75.514 76.403,72.847 76.403,64.719 73.736,62.052 72.72,61.036 71.45,61.036 71.45,59.639 71.831,59.258 72.212,59.258 74.371,61.417 77.546,64.592 77.546,72.085 77.546,72.847 78.816,74.117 79.324,74.625 79.324,75.641 77.927,75.641 76.784,76.784 76.403,77.165 75.006,77.165 71.704,77.165 70.815,76.276 70.561,76.022 70.561,74.371
VCC on Bottom Layer "Top Layer-No Net 1" (solid, remove dead copper, pour order 16): 70.688,17.094 72.339,18.745 72.339,21.92 72.339,22.428 71.704,23.063 70.561,23.063 70.307,23.063 69.164,24.206 68.91,23.952 68.91,23.825 69.418,23.317 69.418,17.221
VCC on Bottom Layer "Top Layer-No Net 1" (solid, remove dead copper, pour order 12): 29.921,77.546 22.936,77.546 18.11,72.72 18.237,72.593 18.237,68.275 21.539,64.973 22.174,64.973 22.174,62.052 22.047,61.925 26.619,57.353 26.619,55.829 28.905,53.543 37.541,53.543 38.557,53.543 39.319,52.781 39.319,51.511 38.684,50.876 29.286,50.876 27.508,52.654 20.015,60.147 20.015,61.163 18.11,63.068 17.983,63.195 15.062,63.195 15.062,74.625 16.332,75.895 19.126,78.689 29.921,78.689
VCC on Bottom Layer "Top Layer-No Net 1" (solid, remove dead copper, pour order 10): 47.447,65.862 46.939,65.862 45.415,67.386 45.288,67.259 43.129,67.259 43.129,65.227 43.256,65.1 47.447,65.1
VCC on Bottom Layer "Top Layer-No Net 1" (solid, remove dead copper, pour order 8): 54.305,61.798 55.194,61.798 55.829,62.433 56.083,62.687 56.083,67.005 56.083,67.64 54.305,69.418 51.892,71.831 50.241,71.831 49.225,71.831 47.574,73.482 42.367,78.689 40.462,78.689 28.524,78.689 28.397,78.562 28.397,77.927 28.651,77.673 28.778,77.546 34.747,77.546 38.176,77.546 40.97,74.752 41.605,74.117 41.605,66.116 42.621,65.1 45.669,65.1 45.669,69.037 46.939,70.307 47.701,70.307 51.765,70.307 52.654,69.418 53.289,68.783 53.289,66.624 53.289,62.687 53.543,62.433
VCC on Bottom Layer "Top Layer-No Net 1" (solid, remove dead copper, pour order 4): 70.561,68.275 69.799,69.037 68.275,69.037 68.275,69.164 67.386,70.053 67.259,70.18 67.259,71.069 67.259,71.45 67.894,72.085 68.021,72.212 69.545,72.212 69.799,72.212 70.942,73.355 71.958,72.339 71.958,71.577 71.958,68.275
VCC on Bottom Layer "Top Layer-No Net 1" (solid, remove dead copper, pour order 2): 71.323,64.973 72.212,64.973 72.339,65.1 72.339,67.386 72.847,67.894 72.847,69.672 72.847,72.974 72.593,73.228 72.593,74.371 70.561,74.371 70.561,66.751 70.942,66.37
GND on Top Layer "Top Layer-No Net 1" (solid, remove dead copper, pour order 28): 7.696,69.037 15.062,76.403 45.034,76.403 50.241,71.196 51.384,70.053 77.165,70.053 84.912,77.8 94.691,77.8 97.993,74.498 97.993,66.37 97.612,65.989 96.977,65.354 91.77,65.354 91.77,10.109 89.23,7.569 74.752,7.569 13.538,7.569 7.696,13.411
GND on Top Layer "Top Layer-No Net 1" (solid, remove dead copper, pour order 26): 47.447,53.416 42.367,53.416 41.732,52.781 41.605,52.654 41.605,43.891 41.605,43.637 42.24,43.002 42.494,42.748 43.891,42.748 44.399,42.748 47.574,45.923 49.86,48.209 51.384,48.209
GND on Top Layer "Top Layer-No Net 1" (solid, remove dead copper, pour order 24): 69.926,67.005 69.926,66.116 69.418,65.608 66.878,65.608 62.941,65.608 59.385,62.052 58.115,60.782 58.115,58.115 58.115,52.146 57.734,51.765 54.051,48.082 52.019,48.082 46.685,48.082 45.669,49.098 45.669,51.638 46.812,52.781 47.447,53.416 54.94,53.416 55.448,53.416 56.083,54.051 56.21,54.178 56.337,54.305 56.337,58.369 56.337,61.925 56.845,62.433 62.687,68.275 69.291,68.275 69.926,67.64
VCC on Top Layer "Top Layer-No Net 1" (solid, remove dead copper, pour order 14): 38.176,53.543 38.557,53.543 39.446,52.654 39.573,52.527 39.573,48.59 39.573,41.986 45.034,36.525 46.177,35.382 46.177,25.349 46.177,18.872 45.796,18.491 45.796,16.967 45.796,15.57 46.558,14.808 47.574,13.792 56.591,13.792 57.48,13.792 64.084,20.396 66.878,23.19 71.323,23.19 75.768,27.635 79.197,31.064 79.197,32.842 79.959,33.604 84.912,33.604 84.912,31.191 74.244,20.523 69.672,20.523 66.116,20.523 62.433,16.84 57.48,11.887 48.336,11.887 46.558,11.887 45.288,13.157 43.51,14.935 43.51,18.237 43.51,19.507 44.399,20.396 44.399,22.936 44.399,23.317 43.764,23.952 43.002,24.714 43.002,33.731 38.938,37.795 36.144,40.589 36.144,51.257 36.144,52.654 37.033,53.543
VCC on Top Layer "Top Layer-No Net 1" (solid, remove dead copper, pour order 6): 68.529,69.418 69.037,69.418 69.545,69.926 69.672,70.053 69.672,71.069 69.672,71.196 69.037,71.831 68.783,72.085 66.878,72.085 54.686,72.085 53.162,70.561 52.908,70.307 52.908,66.751 52.908,62.814 53.543,62.179 53.924,61.798 54.686,61.798 55.575,61.798 55.956,62.179 56.591,62.814 56.591,66.116 59.893,69.418 68.402,69.418

## Keep-outs
Keep-Out Layer:
  the board outline again, w0.203

## Other copper
Top Layer:
  text "size: 100mm x 80mm" at 103.425,4.722 h1.52 r90
  text "TOP SIDE" at 2.722,1.575 h1.52
  text "COMPONENT SIDE" at 40.722,1.575 h1.52
Bottom Layer:
  text "SIMCONS   A1 rev4b" at 3,59 h2.5 r90
  text "BOTTOM SIDE" at 22.004,1.575 h1.52
  text "SOLDER SIDE" at 59.004,1.575 h1.52

## Silkscreen, mask and mechanical layers (free items; w line width, h text height)
Top Overlay:
  the board outline again, w0.203
  text "S/N:" at 46.685,77.8 h2.29 r180
  text "SIMCONS CONTROL SYSTMES" at 91.643,13.538 h2.03 r90
  text "A1 rev3.1" at 19.761,1.473 h2.03
Top Solder:
  the board outline again, w0.203
Bottom Solder:
  the board outline again, w0.203

## Text inside footprints (layer, text, board x,y; h text height)
P1: Bottom Overlay "2" at 85.991,30.048 h1.27 r270; Bottom Overlay "1" at 83.451,30.556 h1.27 r270; Bottom Overlay "9" at 83.451,44.272 h1.27 r270; Bottom Overlay "10" at 85.991,44.272 h1.27 r270